# EAGLE board Stoplight_Feather_PCB_v12 (EAGLE 9.7.0)
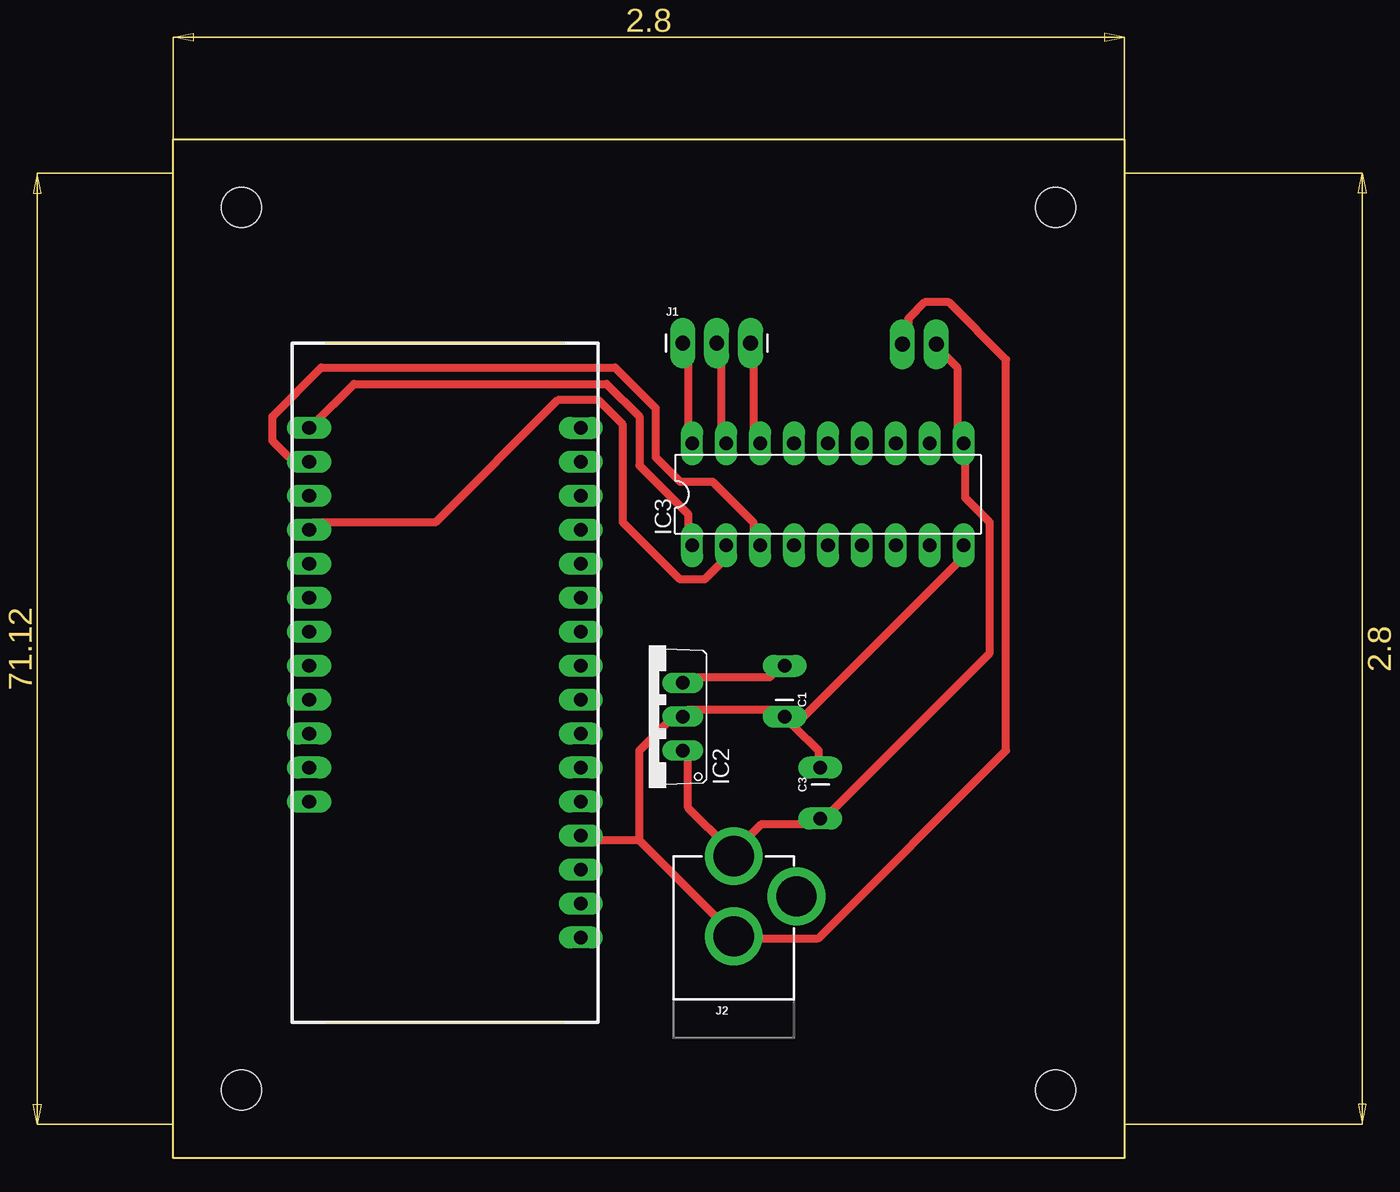
[diagram p0: board, top side]

Size 71.12 x 76.2 mm. Coordinates in mm from the lower left corner, seen from the top.
Outline: 0,76.2 71.12,76.2 71.12,0 0,0 0,76.2
Copper layers (1*16): Top / Bottom
Stack-up Default Layer Stack: Top User Defined 0.035mm / Dielectric-1 User Defined 1.5mm / Bottom User Defined 0.035mm
Design rules "default": minimum track width 6mil, minimum drill 0.35mm, track to track 6mil, track to pad 6mil, pad to pad 6mil, via to via 6mil, smd to smd 6mil, copper to edge 40mil, drill to drill 6mil, minimum pad ring 10mil, minimum via ring 8mil, stop-mask expansion 4mil, vias tented up to drill 0mil, thermal gap 10mil
Net classes: 0 default: width 0.61 mm, drill 0.61 mm, clearance 0.61 mm
Holes 3 mm at 5.08,71.12 5.08,5.08 65.99,5.08 65.99,71.12

## Footprints (pad centres in the part's own frame; a part is rotated, then mirrored left to right if it is on the bottom)
CAP-PTH-2.54 = drill 1.016 pad 1.651 long: 1 -2.54,0; 2 1.27,0
TO220V = drill 1.016 long: 1 -2.54,-2.54; 2 0,-2.54; 3 2.54,-2.54
DIL18 = drill 1.016 pad 1.651 long: 1 -10.16,-3.81; 2 -7.62,-3.81; 3 -5.08,-3.81; 4 -2.54,-3.81; 5 0,-3.81; 6 2.54,-3.81; 7 5.08,-3.81; 8 7.62,-3.81; 9 10.16,-3.81; 10 10.16,3.81; 11 7.62,3.81; 12 5.08,3.81; 13 2.54,3.81; 14 0,3.81; 15 -2.54,3.81; 16 -5.08,3.81; 17 -7.62,3.81; 18 -10.16,3.81
1X03_LONGPADS = drill 1.118 pad 1.88 long: 1 0,0; 2 2.54,0; 3 5.08,0
POWER_JACK_PTH = drill 2.997 pad 4.318: GND 0,7.7; GNDBREAK 4.7,10.7; PWR 0,13.7
1X02_LONGPADS = drill 1.118 pad 1.88 long: 1 0,0; 2 2.54,0
FEATHERWING = drill 1.016 pad 1.651 long: 1 6.35,1.27; 2 8.89,1.27; 3 11.43,1.27; 4 13.97,1.27; 5 16.51,1.27; 6 19.05,1.27; 7 21.59,1.27; 8 24.13,1.27; 9 26.67,1.27; 10 29.21,1.27; 11 31.75,1.27; 12 34.29,1.27; 13 36.83,1.27; 14 39.37,1.27; 15 41.91,1.27; 16 44.45,1.27; 17 44.45,21.59; 18 41.91,21.59; 19 39.37,21.59; 20 36.83,21.59; 21 34.29,21.59; 22 31.75,21.59; 23 29.21,21.59; 24 26.67,21.59; 25 24.13,21.59; 26 21.59,21.59; 27 19.05,21.59; 28 16.51,21.59

## Placement (x,y rotation side)
C1  22pF  [CAP-PTH-2.54]  45.72,34.29 270 top
C3  22pF  [CAP-PTH-2.54]  48.39,27.94 90 top
IC2  7805TV  [TO220V]  35.56,33.02 90 top
IC3  [DIL18]  48.96,49.66 0 top
J1  [1X03_LONGPADS]  38.1,60.96 0 top
J2  POWER_JACK  [POWER_JACK_PTH]  41.91,8.89 0 top
J3  [1X02_LONGPADS]  57.06,60.87 0 bottom
MS1  FEATHERWING  [FEATHERWING]  31.75,10.16 90 top

## Library data of the parts
C1 C3 = Capacitor Long Pads; PROD_ID: CAP-09128
IC2 = linear
IC3 = ULN2803 Long Pads
J1 = 3 pin header Long pad
J2 = SparkFun-Connectors; PROD_ID: CONN-08197
J3 = SparkFun-Connectors
MS1 = Feather Huzzah Long Pads

## Nets
3.3V: C1.1 IC2.3
5V: C3.1 IC2.1 IC3.10 J2.PWR J3.1
GND: C1.2 C3.2 IC2.2 IC3.9 J2.GND J3.2 MS1.4
GREEN: IC3.1 MS1.17
N$1: J2.GNDBREAK
N$2: IC3.18 J1.1
N$3: IC3.17 J1.2
N$4: IC3.16 J1.3
RED: IC3.3 MS1.18
YELLOW: IC3.2 MS1.20

## Tracks (layer width: path | path; a pad name or v marks a point on that pad's centre or on a via)
3.3V
  Top 0.61: IC2.3 38.51,35.97 44.6,35.97 45.21,36.58 C1.1
5V
  Top 0.61: J3.1 57.4,60.35 58.62,59.13 58.62,53.65 IC3.10 59.23,53.04 59.23,49.38 61.06,47.55 61.06,37.79 48.87,25.6 C3.1 48.26,24.99 43.99,24.99 42.16,23.16 J2.PWR 41.55,23.16 38.51,26.21 38.51,30.48 IC2.1
GND
  Top 0.61: C1.2 45.21,33.53 38.51,33.53 IC2.2 37.9,32.92 37.29,32.92 34.85,30.48 34.85,23.77 | C1.2 46.43,32.31 | 46.43,32.31 48.26,30.48 48.26,29.26 C3.2 | 46.43,32.31 58.62,44.5 58.62,45.72 IC3.9 | 45.82,32.92 C1.2 | 34.85,23.77 30.58,23.77 MS1.4 | 34.85,23.77 41.55,17.07 J2.GND 42.16,16.46 48.26,16.46 62.28,30.48 62.28,59.74 58.01,64.01 56.19,64.01 54.97,62.79 54.97,60.96 J3.2
GREEN
  Top 0.61: IC3.1 38.51,46.33 38.51,48.16 34.85,51.82 34.85,55.47 32.41,57.91 13.51,57.91 10.46,54.86 MS1.17
N$2
  Top 0.61: IC3.18 38.51,53.65 38.51,60.96 J1.1
N$3
  Top 0.61: IC3.17 40.95,53.65 40.95,60.96 J1.2
N$4
  Top 0.61: IC3.16 43.38,53.65 43.38,60.96 J1.3
RED
  Top 0.61: IC3.3 43.38,46.33 43.38,47.55 40.34,50.6 37.9,50.6 36.07,52.43 36.07,56.08 33.02,59.13 11.07,59.13 7.42,55.47 7.42,53.65 8.64,52.43 9.86,52.43 MS1.18
YELLOW
  Top 0.61: MS1.20 10.46,47.55 19.61,47.55 28.75,56.69 31.8,56.69 33.63,54.86 33.63,47.55 37.9,43.28 39.73,43.28 40.95,44.5 40.95,45.72 IC3.2